# Altium PCB GR_Split.PcbDoc
Units mm, origin at the board's own origin, x right, y up, seen from the top; angles counter-clockwise.
Board outline 100 x 20 mm, 2 copper layers (Top Layer, Bottom Layer); 26 components, 22 nets, 69 pads, 12 vias.
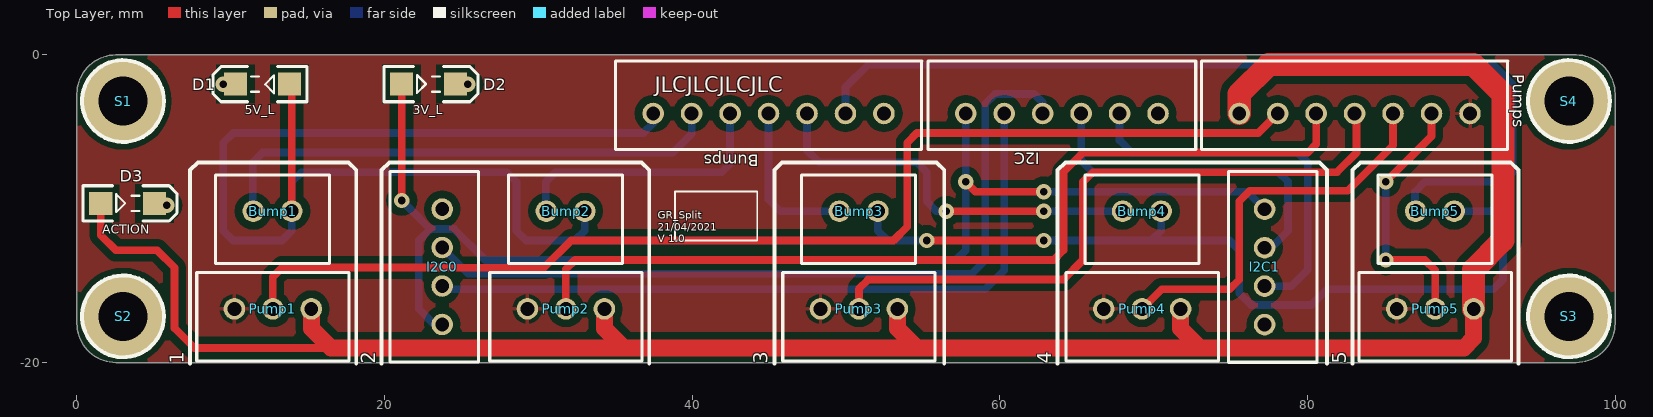
[diagram p0: Top Layer view]
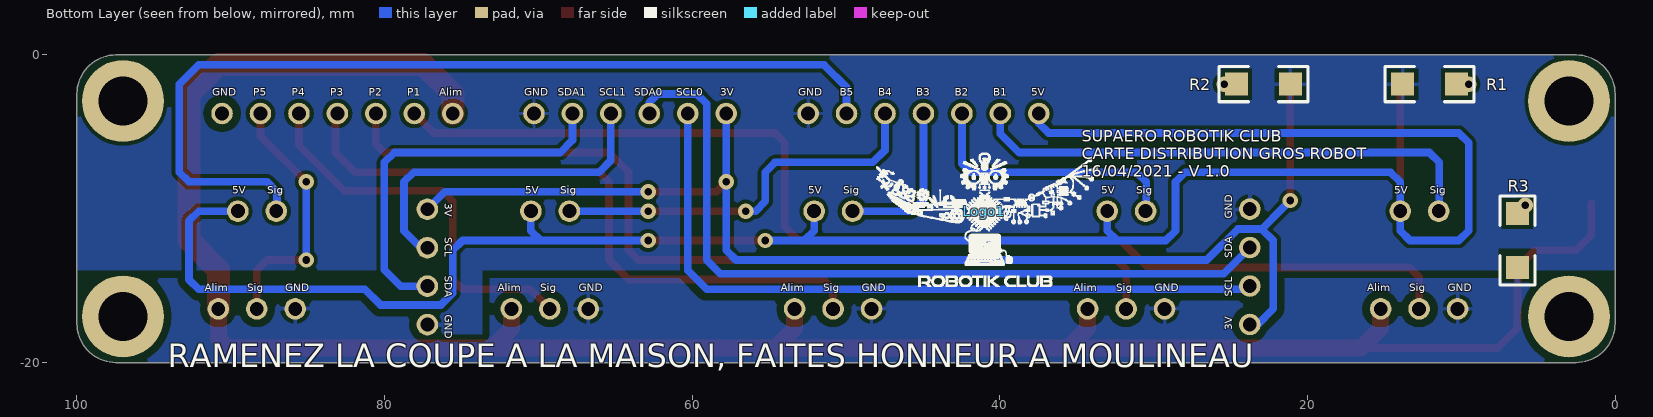
[diagram p1: Bottom Layer view, seen from below]
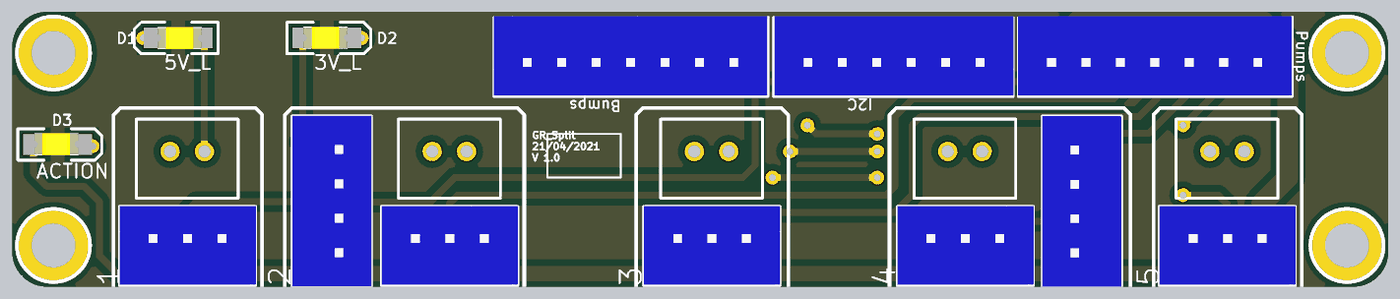
[diagram p2: 3D render of the assembled board from above, using the file's embedded part models]
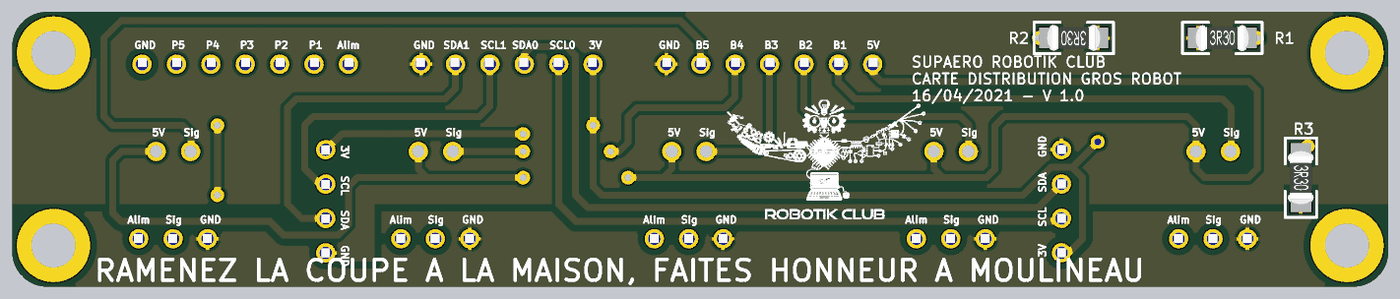
[diagram p3: 3D render of the assembled board from below, using the file's embedded part models]

## Layer stack, top to bottom
Top Solder: solder mask 0.0102, Solder Resist, Dk 3.5
Top Layer: signal copper 0.0356
Dielectric 1: dielectric 0.32, FR-4, Dk 4.8
Bottom Layer: signal copper 0.0356
Bottom Solder: solder mask 0.0102, Solder Resist, Dk 3.5

## Board outline
20,0 97.46,0 cw(c97.46,-2.54) 100,-2.54 100,-5 100,-17.46 cw(c97.46,-17.46) 97.46,-20 69,-20 2.54,-20 cw(c2.54,-17.46) 0,-17.46 0,-9 0,-2.54 cw(c2.54,-2.54) 2.54,0 20,0

## Design rules (kind name [scope] priority, off if disabled: settings)
Clearance Clearance_GND_A [InNet('GND_A')] p1: gap=0.254 except(0.5: Arc-Poly Track-Poly SMDPad-Poly THPad-Poly Via-Poly Fill-Poly Poly-Poly Poly-Region Poly-Text)
Clearance [All] p2: gap=0.254 except(0.75: Poly-Poly)
ComponentClearance ComponentClearance_Logo [InComponent('Logo')] p1: gap=0 collisioncheckmode=3 verticalgap=0 showdistances=FALSE
ComponentClearance ComponentClearance_1206_C [HasFootprint('Logo_lowres')] p2: gap=0 collisioncheckmode=3 verticalgap=0 showdistances=FALSE
ComponentClearance ComponentClearance_1206_DD [HasFootprint('SMB')] p3: gap=0 collisioncheckmode=3 verticalgap=0 showdistances=FALSE
ComponentClearance ComponentClearance_1206_R [HasFootprint('Resistor 1206')] p4: gap=0 collisioncheckmode=3 verticalgap=0 showdistances=FALSE
ComponentClearance ComponentClearance_1206_D [HasFootprint('KP-3216SEC')] p5: gap=0 collisioncheckmode=3 verticalgap=0 showdistances=FALSE
ComponentClearance [All] p6: gap=0.254 collisioncheckmode=3 verticalgap=0.254 showdistances=FALSE
PolygonConnect PolygonConnect_Minifit [HasFootprint('MOLEX_MINIFITJR_3X2')] p1: connectstyle=Relief reliefconductorwidth=0.6 reliefentries=4 polygonreliefangle="90 Angle" airgapwidth=0.4
PolygonConnect PolygonConnect_GND_A [InNet('GND_A') vs HasFootprint('MOLEX_MINIFITJR_3X2') Or HasFootprint('S5B-XH-A') Or HasFootprint('S4B-XH-A' )Or HasFootprint('S3B-XH-A')] p2: connectstyle=Relief reliefconductorwidth=0.6 reliefentries=4 polygonreliefangle="90 Angle" airgapwidth=0.4
PolygonConnect [All] p3: connectstyle=Relief reliefconductorwidth=0.254 reliefentries=4 polygonreliefangle="90 Angle" airgapwidth=0.254
RoutingVias [All] p1: holewidth=0.711 width=1.27 viastyle="Through Hole" minholewidth=0.711 minwidth=1.27 maxholewidth=0.711 maxwidth=1.27
SilkToSilkClearance [All] p1 off: silktosilkclearance=0.254
SolderMaskExpansion [All] p1: expansion=0.102
Width [All] p1: maxlimit=2 minlimit=0.25 preferedwidth=0.5
28 further rules are at their usual default settings.

## Components (designator, comment, footprint, x,y, rotation, side; value= is the part's Value field where it differs from the comment)
Bump1 "Header 2" B2B-XH-A 13.97,-10.16 r180 top locked
Bump2 "Header 2" B2B-XH-A 33.02,-10.16 r180 top locked
Bump3 "Header 2" B2B-XH-A 52.07,-10.16 r180 top locked
Bump4 "Header 2" B2B-XH-A 70.485,-10.16 r180 top locked
Bump5 "Header 2" B2B-XH-A 89.535,-10.16 r180 top locked
Bumps "Header 7H" B7B-XH-A 37.465,-3.81 r0 top locked
D1 "5V_L" KP-3216SEC 12.065,-1.905 r180 top
D2 "3V_L" KP-3216SEC 22.86,-1.905 r0 top
D3 "ACT" KP-3216SEC 3.302,-9.652 r0 top
I2C "Header 6H" B6B-XH-A 57.785,-3.81 r0 top locked
I2C0 "Header 4H" B4B-XH-A 23.749,-17.526 r90 top locked
I2C1 "Header 4H" B4B-XH-A 77.216,-10.033 r270 top locked
Logo1 "Comment" Logo_lowres 41.021,-10.16 r180 bottom
Pump1 "Header 3" B3B-XH-A 15.24,-16.51 r180 top locked
Pump2 "Header 3" B3B-XH-A 34.29,-16.51 r180 top locked
Pump3 "Header 3" B3B-XH-A 53.34,-16.51 r180 top locked
Pump4 "Header 3" B3B-XH-A 71.755,-16.51 r180 top locked
Pump5 "Header 3" B3B-XH-A 90.805,-16.51 r180 top locked
Pumps "Header 7H" B7B-XH-A 75.565,-3.81 r0 top locked
R1 "Res2" "Resistor 1206" 12.065,-1.905 r180 bottom
R2 "Res2" "Resistor 1206" 22.86,-1.905 r0 bottom
R3 "Res2" "Resistor 1206" 6.35,-12.065 r270 bottom
S1 "Screw M3" "Screw M3" 3,-3 r0 top locked
S2 "Screw M3" "Screw M3" 3,-17 r0 top locked
S3 "Screw M3" "Screw M3" 97,-17 r0 top locked
S4 "Screw M3" "Screw M3" 97,-3 r0 top locked

## Footprints (in the part's own frame and the unit in brackets; to place one, negate y for a bottom-side part, rotate by r counter-clockwise, add the part's x,y. Pads: shape width x height; smd on the part's side, far side on the other; paste and mask are expansions set on the pad)
B2B-XH-A [mm]
  round 1.4 hole 0.9: 1(0,0) 2(2.5,0)
  silkscreen extent -2.45,-2.35 4.95,3.4
B3B-XH-A [mm]
  round 1.4 hole 0.9: 1(0,0) 2(2.5,0) 3(5,0)
  silkscreen extent -2.45,-2.35 7.45,3.4, body extent -2.46,-2.39 7.44,3.36, height 7
B4B-XH-A [mm]
  round 1.4 hole 0.9: 1(0,0) 2(2.5,0) 3(5,0) 4(7.5,0)
  silkscreen extent -2.45,-2.35 9.96,3.4, body extent -2.44,-2.37 9.96,3.38, height 7
B6B-XH-A [mm]
  round 1.4 hole 0.9: 1(0,0) 2(2.5,0) 3(5,0) 4(7.5,0) 5(10,0) 6(12.5,0)
  silkscreen extent -2.45,-2.35 14.95,3.4, body extent -2.4,-2.27 15,3.48, height 7
B7B-XH-A [mm]
  round 1.4 hole 0.9: 1(0,0) 2(2.5,0) 3(5,0) 4(7.5,0) 5(10,0) 6(12.5,0) 7(15,0)
  silkscreen extent -2.45,-2.35 17.48,3.4, body extent -2.48,-2.27 17.42,3.48, height 7
KP-3216SEC [mm]
  rect 1.5x1.5 smd: 1(-1.75,0) 2(1.75,0)
  silkscreen extent -2.89,-1.14 3.2,1.14, body extent -1.7,-0.79 1.5,0.81, height 1.1
Logo_lowres [mm]
  silkscreen extent -7.01,-4.93 7.39,3.76
"Resistor 1206" [mm]
  rect 1.5x1.5 smd: 1(-1.75,0) 2(1.75,0)
  silkscreen extent -2.89,-1.14 2.89,1.14, body extent -1.98,-0.95 1.98,0.93, height 0.55
"Screw M3" [mm] "M3 iso Screw"
  round 5.32 hole 3.2 unplated: 0(0,0)
  silkscreen extent -2.66,-2.66 2.66,2.66

## Part data
Bump1 Bump2 Bump3 Bump4 Bump5: "Header, 2-Pin"
Bumps Pumps: "Header, 7-Pin, Right Angle"
D1 D2 D3: library part LED2, "Typical RED, GREEN, YELLOW, AMBER GaAs LED"
I2C: "Header, 6-Pin, Right Angle"
I2C0 I2C1: "Header, 4-Pin, Right Angle"
Pump1 Pump2 Pump3 Pump4 Pump5: "Header, 3-Pin"
R1 R2 R3: "Resistor"

## Via types
v1: diameter 1, hole 0.5, Top Layer to Bottom Layer, 12 vias

## Nets (pads, with @x,y where several pads share a name; then routed paths per layer and width w, separated by ;. In a path a pad name is that pad's centre, name@x,y a point inside that pad or via, vN(x,y) a via of type N, cw(c..) or ccw(c..) an arc to the next point about the centre after c; other vN are vias at no path point)
3V_L: D2.1 I2C0.1 I2C1.1 I2C.1 | length 82.6
  Top Layer w0.5: v1(21.11,-9.464) D2.1 ; v1(57.785,-8.255) 58.42,-8.89 v1(62.865,-8.89)
  Bottom Layer w0.5: v1(21.11,-9.464) 21.59,-9.944 22.968,-11.322 ; I2C0.1 23.241,-17.526 22.225,-16.51 22.225,-12.065 22.968,-11.322 ; I2C.1 57.785,-12.7 57.15,-13.335 26.543,-13.335 24.53,-11.322 22.968,-11.322 ; v1(62.865,-8.89) 76.073,-8.89 I2C1.1
5V_L: Bump1.1 Bump2.1 Bump3.1 Bump4.1 Bump5.1 Bumps.1 D1.1 | length 151.9
  Top Layer w0.5: D1.1 13.97,-2.06 Bump1.1 ; v1(55.245,-12.065) 55.372,-12.192 55.499,-12.065 v1(62.865,-12.065)
  Bottom Layer w0.5: Bump2.1 33.02,-11.43 32.385,-12.065 ; Bumps.1 37.465,-4.445 36.83,-5.08 10.16,-5.08 9.525,-5.715 9.525,-11.43 10.16,-12.065 13.335,-12.065 13.97,-11.43 Bump1.1 13.97,-8.255 14.605,-7.62 27.94,-7.62 28.575,-8.255 28.575,-11.43 29.21,-12.065 32.385,-12.065 ; Bump3.1 52.07,-11.43 52.705,-12.065 ; v1(55.245,-12.065) 52.705,-12.065 ; v1(62.865,-12.065) 69.85,-12.065 ; Bump4.1 70.485,-11.43 69.85,-12.065 ; Bump5.1 92.075,-10.16 92.71,-10.795 92.71,-14.605 92.075,-15.24 81.28,-15.24 80.264,-16.256 76.327,-16.256 75.565,-15.494 75.565,-12.7 74.93,-12.065 69.85,-12.065 ; 32.385,-12.065 52.705,-12.065
ALIM_P: D3.1 Pump1.1 Pump2.1 Pump3.1 Pump4.1 Pump5.1 Pumps.1 | length 145.8
  Top Layer w0.5: D3.1 1.552,-11.712 2.54,-12.7 5.207,-12.7 6.35,-13.843 6.35,-17.78 7.62,-19.05 16.51,-19.05
  Top Layer w1.1: Pump1.1 15.24,-17.78 16.51,-19.05 35.56,-19.05 ; Pump2.1 34.29,-17.78 35.56,-19.05 ; Pump3.1 53.34,-17.78 54.61,-19.05 ; Pump4.1 71.755,-17.78 73.025,-19.05 ; Pump5.1 90.805,-18.415 90.17,-19.05 73.025,-19.05 ; 35.56,-19.05 54.61,-19.05 ; 54.61,-19.05 73.025,-19.05
  Top Layer w1.5: Pumps.1 75.565,-2.54 77.47,-0.635 90.805,-0.635 92.71,-2.54 92.71,-12.065 90.805,-13.97 Pump5.1
BUMP_1: Bump1.2 Bumps.2 | length 33.8
  Bottom Layer w0.5: Bump1.2@11.43,-10.12 11.43,-6.985 12.065,-6.35 38.735,-6.35 39.965,-5.12 Bumps.2
BUMP_2: Bump2.2 Bumps.3 | length 17.7
  Bottom Layer w0.5: Bump2.2 30.48,-10.12 30.48,-8.255 31.115,-7.62 41.91,-7.62 42.465,-7.065 Bumps.3
BUMP_3: Bump3.2 Bumps.4 | length 10.5
  Bottom Layer w0.5: Bumps.4 44.965,-9.405 45.72,-10.16 Bump3.2
BUMP_4: Bump4.2 Bumps.5 | length 25.7
  Top Layer w0.5: v1(56.515,-10.16) v1(62.865,-10.16)
  Bottom Layer w0.5: Bumps.5 47.465,-6.19 48.26,-6.985 54.61,-6.985 55.245,-7.62 55.245,-9.525 55.88,-10.16 v1(56.515,-10.16) ; v1(62.865,-10.16) Bump4.2
BUMP_5: Bump5.2 Bumps.6 | length 60.1
  Bottom Layer w0.5: Bumps.6 49.965,-2.105 51.435,-0.635 92.075,-0.635 93.345,-1.905 93.345,-7.62 92.71,-8.255 87.63,-8.255 86.995,-8.89 86.995,-10.12 Bump5.2
GND_A: Pump1.3 Pump2.3 Pump3.3 Pump4.3 Pump5.3 Pumps.7 R3.2
GND_L: Bumps.7 I2C0.4 I2C1.4 I2C.6 R1.1 R2.1
NetD1_2: D1.2 R1.2
  other v1: 9.525,-1.905
NetD2_2: D2.2 R2.2
  other v1: 25.4,-1.905
NetD3_2: D3.2 R3.1
  other v1: 5.842,-9.779
PUMP_1: Pump1.2 Pumps.2 | length 75
  Top Layer w0.5: Pump1.2 12.74,-14.438 13.356,-13.822 24.248,-13.822 24.263,-13.837 30.359,-13.837 32.131,-12.065 53.086,-12.065 53.975,-11.176 53.975,-5.715 54.61,-5.08 76.795,-5.08 Pumps.2
PUMP_2: Pump2.2 Pumps.3 | length 59.7
  Top Layer w0.5: Pump2.2 31.79,-13.93 32.385,-13.335 63.5,-13.335 64.135,-12.7 64.135,-7.62 65.405,-6.35 80.01,-6.35 80.565,-5.795 Pumps.3
PUMP_3: Pump3.2 Pumps.4 | length 42.9
  Top Layer w0.5: Pump3.2 50.84,-15.2 51.435,-14.605 64.135,-14.605 65.405,-13.335 65.405,-8.255 66.04,-7.62 81.915,-7.62 83.185,-6.35 83.185,-3.93 Pumps.4
PUMP_4: Pump4.2 Pumps.5 | length 25.8
  Top Layer w0.5: Pump4.2 70.525,-15.24 74.93,-15.24 75.565,-14.605 75.565,-9.525 76.261,-8.829 82.611,-8.829 85.565,-5.875 Pumps.5
PUMP_5: Pump5.2 Pumps.6 | length 16.8
  Top Layer w0.5: v1(85.09,-13.335) 87.63,-13.335 88.305,-14.01 Pump5.2 ; v1(85.09,-8.255) 88.065,-5.28 Pumps.6
  Bottom Layer w0.5: v1(85.09,-13.335) v1(85.09,-8.255)
T_I2C_0_SCL: I2C0.2 I2C.2 | length 47.2
  Bottom Layer w0.5: I2C0.2@23.749,-15.24 59.055,-15.24 60.285,-14.01 I2C.2
T_I2C_0_SDA: I2C0.3 I2C.3 | length 51.5
  Bottom Layer w0.5: I2C0.3 25.447,-14.224 58.166,-14.224 59.055,-13.335 59.055,-3.175 59.69,-2.54 62.23,-2.54 62.785,-3.095 I2C.3
T_I2C_1_SCL: I2C1.2 I2C.4 | length 22.2
  Bottom Layer w0.5: I2C.4 65.285,-6.865 66.04,-7.62 78.105,-7.62 78.74,-8.255 78.74,-11.43 77.637,-12.533 I2C1.2
T_I2C_1_SDA: I2C1.3 I2C.5 | length 24.8
  Bottom Layer w0.5: I2C.5 67.785,-5.555 68.58,-6.35 79.375,-6.35 80.01,-6.985 80.01,-13.97 78.947,-15.033 I2C1.3
pads on no net: S1.0 S2.0 S3.0 S4.0

## Polygon pours and split planes (outlines as drawn)
GND_A on Top Layer "Top GND_A" (solid, pour order 2): 41,0 97.46,0 cw(c97.46,-2.54) 100,-2.54 100,-10 100,-17.46 cw(c97.46,-17.46) 97.46,-20 68,-20 2.54,-20 cw(c2.54,-17.46) 0,-17.46 0,-9 0,-2.54 cw(c2.54,-2.54) 2.54,0 15,0
GND_A on Bottom Layer "Bot GND_A" (solid, remove dead copper, pour order 6): 46,0 97.46,0 cw(c97.46,-2.54) 100,-2.54 100,-9.797 100,-17.46 cw(c97.46,-17.46) 97.46,-20 59,-20 2.54,-20 cw(c2.54,-17.46) 0,-17.46 0,-10 0,-2.54 cw(c2.54,-2.54) 2.54,0 37,0
GND_L on Bottom Layer "Bot GND_L" (solid, remove dead copper, pour order 4): 41,0 97.46,0 cw(c97.46,-2.54) 100,-2.54 100,-9 100,-14 77.724,-14 77.724,-18.161 73.658,-18.161 73.658,-14 0,-14 0,-2.54 cw(c2.54,-2.54) 2.54,0 18,0

## Silkscreen, mask and mechanical layers (free items; w line width, h text height)
Top Overlay:
  lines w0.127: 38.895,-12.063 38.895,-8.888 44.229,-8.888 44.229,-12.063 38.895,-12.063
  lines w0.254: 7.366,-20.066 7.366,-7.493 7.874,-6.985 10.668,-6.985 17.653,-6.985 18.161,-7.493 18.161,-20.066 ; 19.812,-20.066 19.812,-7.493 20.32,-6.985 33.909,-6.985 36.703,-6.985 37.211,-7.493 37.211,-20.066 ; 45.339,-20.066 45.339,-7.493 45.847,-6.985 53.086,-6.985 55.88,-6.985 56.388,-7.493 56.388,-20.066 ; 63.754,-20.066 63.754,-7.493 64.262,-6.985 78.232,-6.985 ; 77.978,-6.985 80.772,-6.985 81.28,-7.493 81.28,-20.066 ; 82.931,-20.066 82.931,-7.493 83.439,-6.985 90.424,-6.985 93.218,-6.985 93.726,-7.493 93.726,-20.066
  text "JLCJLCJLCJLC" at 37.583,-2.426 h1
  text "5V_L" at 10.922,-4.064 h1.02
  text "3V_L" at 21.844,-4.064 h1.02
  text "ACTION" at 1.651,-11.811 h1.02
  text "GR_Split / 21/04/2021 / V 1.0" at 37.752,-12.19 h0.51
  text "1" at 7.239,-20.066 h1.52 r90
  text "2" at 19.685,-20.066 h1.52 r90
  text "3" at 45.212,-20.066 h1.52 r90
  text "4" at 63.627,-20.066 h1.52 r90
  text "5" at 82.804,-20.066 h1.52 r90
Bottom Overlay:
  text "5V" at 37.973,-2.667 h0.51
  text "B1" at 40.419,-2.667 h0.51
  text "B2" at 42.919,-2.667 h0.51
  text "B3" at 45.419,-2.667 h0.51
  text "B4" at 47.919,-2.667 h0.51
  text "B5" at 50.419,-2.667 h0.51
  text "GND" at 53.1,-2.667 h0.51
  text "3V" at 58.166,-2.667 h0.51
  text "SCL0" at 61.04,-2.667 h0.51
  text "SDA0" at 63.754,-2.667 h0.51
  text "SCL1" at 66.04,-2.667 h0.51
  text "SDA1" at 68.754,-2.667 h0.51
  text "GND" at 70.92,-2.667 h0.51
  text "Alim" at 76.454,-2.667 h0.51
  text "P1" at 78.519,-2.667 h0.51
  text "P2" at 81.019,-2.667 h0.51
  text "P3" at 83.519,-2.667 h0.51
  text "P4" at 86.019,-2.667 h0.51
  text "P5" at 88.519,-2.667 h0.51
  text "GND" at 91.2,-2.667 h0.51
  text "SUPAERO ROBOTIK CLUB / CARTE DISTRIBUTION GROS ROBOT / 16/04/2021 - V 1.0" at 34.671,-7.937 h0.76
  text "Sig" at 12.065,-9.017 h0.51
  text "5V" at 14.351,-9.017 h0.51
  text "Sig" at 31.115,-9.017 h0.51
  text "5V" at 33.401,-9.017 h0.51
  text "Sig" at 50.165,-9.017 h0.51
  text "5V" at 52.451,-9.017 h0.51
  text "Sig" at 68.58,-9.017 h0.51
  text "5V" at 70.866,-9.017 h0.51
  text "Sig" at 87.63,-9.017 h0.51
  text "5V" at 89.916,-9.017 h0.51
  text "3V" at 76.073,-9.652 h0.51 r90
  text "GND" at 24.892,-10.661 h0.51 r270
  text "SCL" at 76.073,-11.851 h0.51 r90
  text "SDA" at 24.892,-13.208 h0.51 r270
  text "SDA" at 76.073,-14.351 h0.51 r90
  text "GND" at 10.875,-15.367 h0.51
  text "Sig" at 13.375,-15.367 h0.51
  text "Alim" at 16.129,-15.367 h0.51
  text "GND" at 29.925,-15.367 h0.51
  text "Sig" at 32.425,-15.367 h0.51
  text "Alim" at 35.179,-15.367 h0.51
  text "GND" at 48.975,-15.367 h0.51
  text "Sig" at 51.475,-15.367 h0.51
  text "Alim" at 54.229,-15.367 h0.51
  text "GND" at 67.39,-15.367 h0.51
  text "Sig" at 69.89,-15.367 h0.51
  text "Alim" at 72.644,-15.367 h0.51
  text "GND" at 86.44,-15.367 h0.51
  text "Sig" at 88.94,-15.367 h0.51
  text "Alim" at 91.694,-15.367 h0.51
  text "SCL" at 24.892,-15.708 h0.51 r270
  text "GND" at 76.073,-16.898 h0.51 r90
  text "3V" at 24.892,-17.907 h0.51 r270
  text "RAMENEZ LA COUPE A LA MAISON, FAITES HONNEUR A MOULINEAU" at 94.107,-20.32 h1.52
Mechanical 2:
  lines w0.254: 0,-18.73 ccw(c1.27,-18.73) 1.27,-20 47,-20 98.73,-20 ccw(c98.73,-18.73) 100,-18.73 100,-1.27 ccw(c98.73,-1.27) 98.73,0 48,0 1.27,0 ccw(c1.27,-1.27) 0,-1.27 0,-18.73

## Dimensions
0,-9 to 3,-3 on Mechanical 3
20,0 to 2.54,-20 on Mechanical 3
20,0 to 3,-3 on Mechanical 3
100.002,-3 to 0.002,-4 on Mechanical 3